# EAGLE board Medium_G2iM+_kit (EAGLE 5.06)
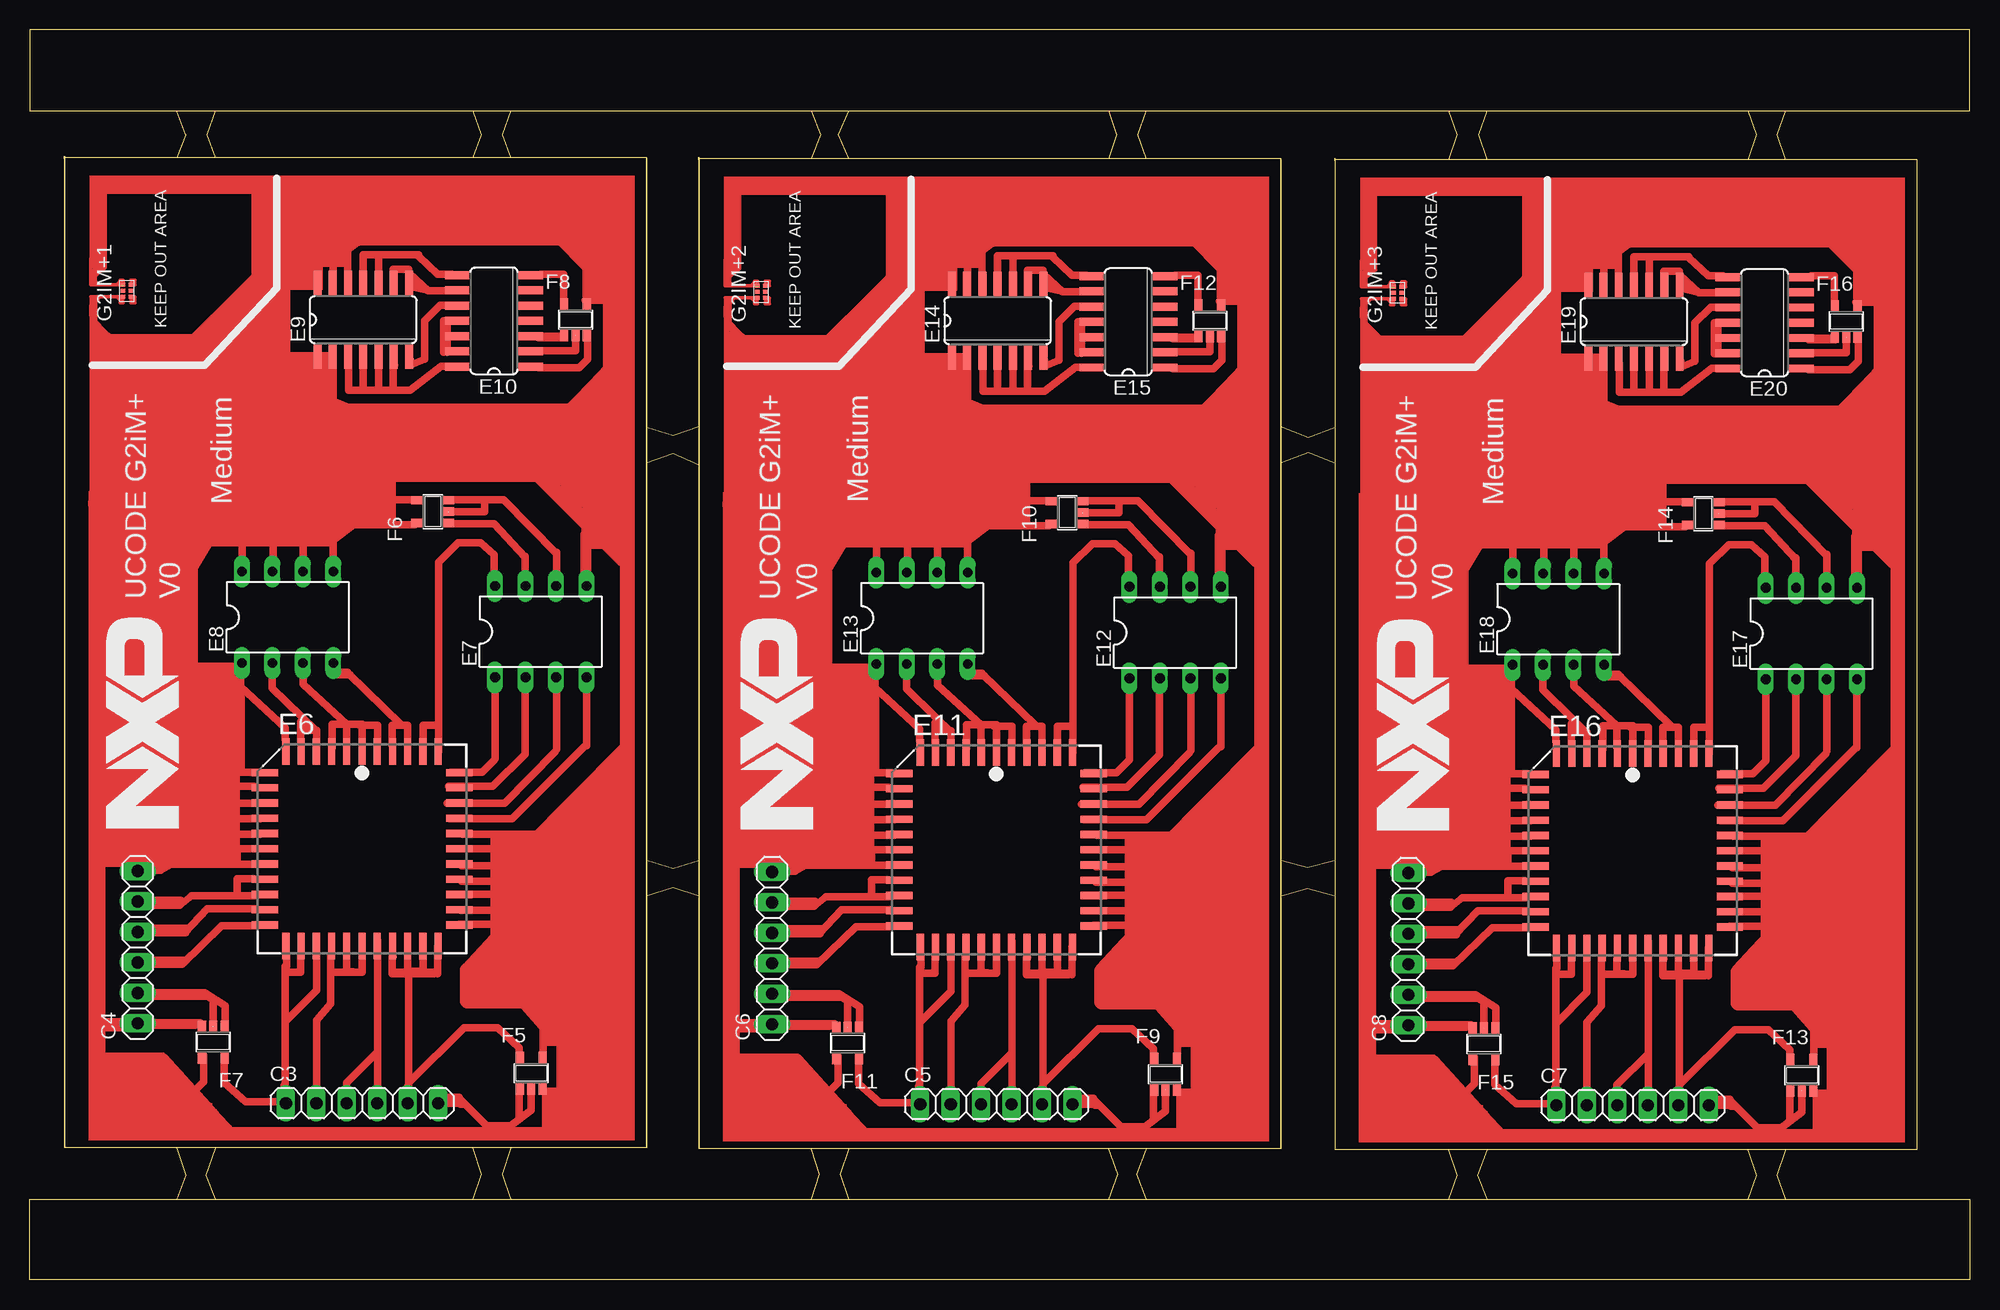
[diagram p0: board, top side]
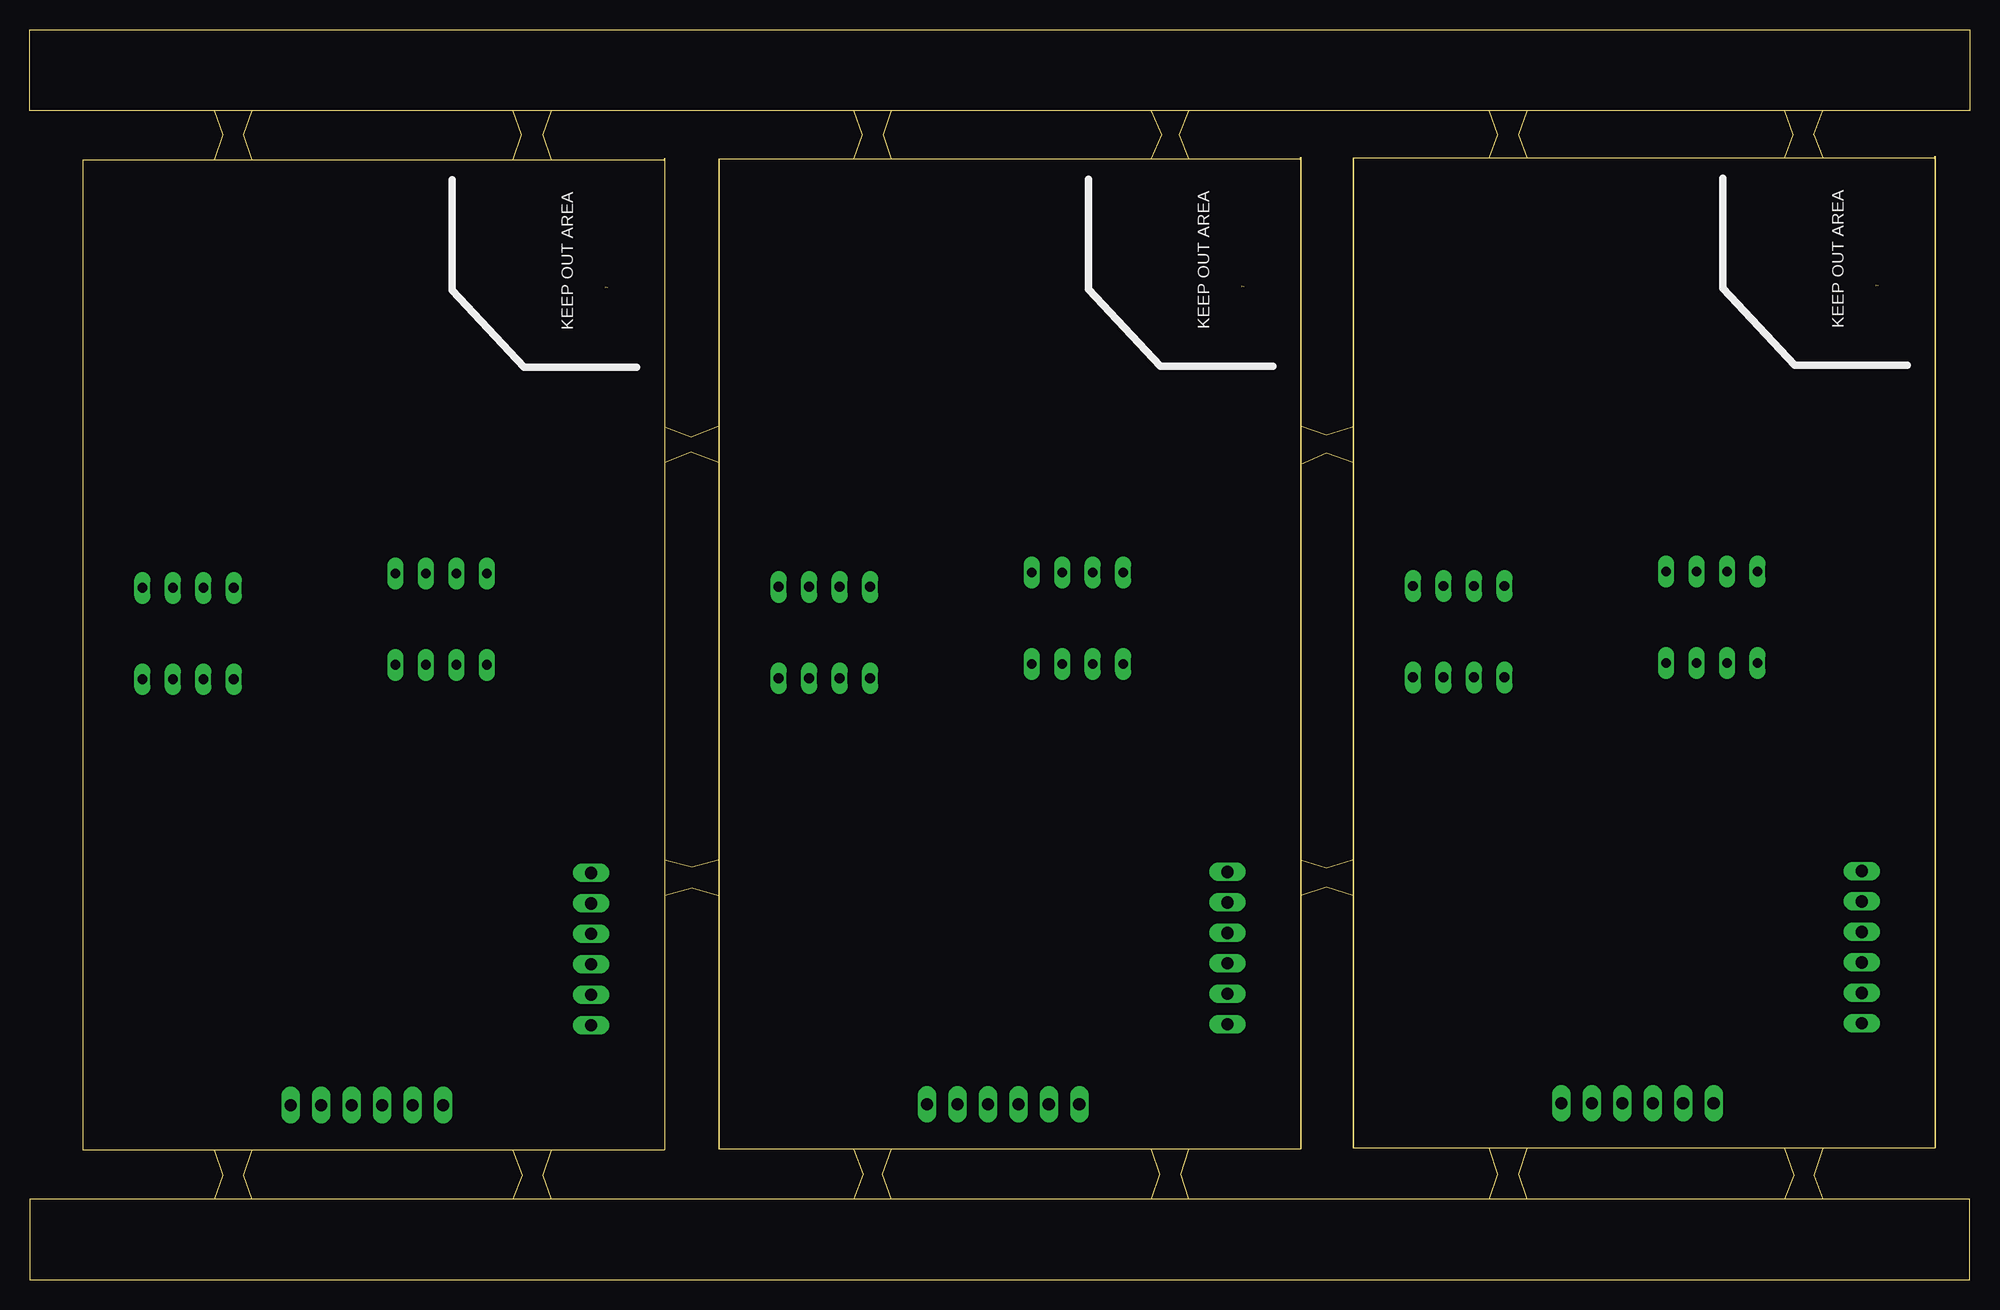
[diagram p1: board, bottom side, seen from below]

Size 161.68 x 104.16 mm. Coordinates in mm from the lower left corner, seen from the top.
Outline: 55.76,71.12 55.76,93.42 104.26,93.42 104.26,10.92 55.76,10.92 55.76,32
Outline: 55.76,71.12 55.76,67.92
Outline: 55.76,67.92 55.76,34.96
Outline: 55.76,34.96 55.76,32
Outline: 108.8,71.04 108.8,93.34 157.3,93.34 157.3,10.84 108.8,10.84 108.8,32
Outline: 108.8,71.04 108.8,68.08
Outline: 108.8,68.08 108.8,34.96
Outline: 108.8,34.96 108.8,32
Outline: 12.24,97.44 0,97.44 0,104.16 161.68,104.16 161.68,97.44 146.32,97.44
Outline: 12.24,97.44 15.44,97.44
Outline: 15.44,97.44 36.88,97.44
Outline: 36.88,97.44 40.08,97.44
Outline: 40.08,97.44 65.12,97.44
Outline: 65.12,97.44 68.24,97.44
Outline: 68.24,97.44 89.92,97.44
Outline: 89.92,97.44 93.04,97.44
Outline: 93.04,97.44 118.24,97.44
Outline: 118.24,97.44 121.44,97.44
Outline: 121.44,97.44 143.2,97.44
Outline: 143.2,97.44 146.32,97.44
Outline: 12.24,6.72 0,6.72 0,0 161.68,0 161.68,6.72 146.32,6.72
Outline: 12.24,6.72 15.44,6.72
Outline: 15.44,6.72 36.88,6.72
Outline: 36.88,6.72 40.08,6.72
Outline: 40.08,6.72 65.12,6.72
Outline: 65.12,6.72 68.24,6.72
Outline: 68.24,6.72 89.92,6.72
Outline: 89.92,6.72 93.04,6.72
Outline: 93.04,6.72 118.24,6.72
Outline: 118.24,6.72 121.44,6.72
Outline: 121.44,6.72 143.2,6.72
Outline: 143.2,6.72 146.32,6.72
Outline: 12.24,93.52 12.96,95.44 12.24,97.44
Outline: 15.44,97.44 14.72,95.44 15.44,93.52
Outline: 40.08,97.44 39.36,95.44 40.08,93.52
Outline: 36.88,97.44 37.6,95.44 36.88,93.52
Outline: 51.44,71.04 53.6,70.4 55.76,71.12
Outline: 104.24,71.12 106.56,70.24 108.8,71.04
Outline: 51.36,68.08 53.6,68.88 55.76,67.92
Outline: 104.24,68.08 106.56,68.96 108.8,68.08
Outline: 51.44,34.96 53.6,34.32 55.76,34.96
Outline: 104.32,34.96 106.48,34.4 108.8,34.96
Outline: 51.36,32 53.6,32.72 55.76,32
Outline: 104.32,32 106.48,32.64 108.8,32
Outline: 12.24,10.96 12.96,8.72 12.24,6.72
Outline: 15.44,10.96 14.64,8.72 15.44,6.72
Outline: 36.88,10.96 37.6,8.8 36.88,6.72
Outline: 40.08,10.96 39.36,8.8 40.08,6.72
Outline: 65.12,97.44 65.92,95.44 65.12,93.44
Outline: 65.12,10.88 65.76,8.8 65.12,6.72
Outline: 68.24,97.44 67.36,95.44 68.24,93.44
Outline: 68.24,10.88 67.52,8.8 68.24,6.72
Outline: 93.04,97.44 92.32,95.44 93.04,93.44
Outline: 89.92,97.44 90.56,95.44 89.92,93.44
Outline: 89.92,10.88 90.64,8.8 89.92,6.72
Outline: 93.04,10.88 92.24,8.8 93.04,6.72
Outline: 118.24,97.44 118.96,95.44 118.24,93.36
Outline: 121.44,97.44 120.72,95.44 121.44,93.36
Outline: 118.24,10.8 118.96,8.72 118.24,6.72
Outline: 121.44,10.8 120.64,8.72 121.44,6.72
Outline: 146.32,97.44 145.6,95.44 146.32,93.36
Outline: 143.2,97.44 143.92,95.44 143.2,93.36
Outline: 143.2,10.8 143.92,8.72 143.2,6.72
Outline: 146.32,10.8 145.6,8.72 146.32,6.72
Outline: 51.38,11 2.88,11 2.88,93.5 51.38,93.5 51.38,11
Outline: 157.28,10.86 108.78,10.86 108.78,93.36 157.28,93.36 157.28,10.86
Outline: 104.24,10.94 55.74,10.94 55.74,93.44 104.24,93.44 104.24,10.94
Outline: 51.36,11.02 2.86,11.02 2.86,93.52 51.36,93.52 51.36,11.02
Outline: 51.38,11.02 2.88,11.02 2.88,93.52 51.38,93.52 51.38,11.02
Outline: 104.26,10.94 55.76,10.94 55.76,93.44 104.26,93.44 104.26,10.94
Outline: 157.3,10.86 108.8,10.86 108.8,93.36 157.3,93.36 157.3,10.86
Copper layers (1*16): Top 0.035mm / dielectric 1.5mm / Bottom 0.035mm
Design rules "default *": minimum track width 10mil, minimum drill 24mil, track to track 0mil, track to pad 0mil, pad to pad 0mil, via to via 8mil, smd to smd 0mil, copper to edge 40mil, drill to drill 8mil, minimum pad ring 10mil, minimum via ring 8mil, stop-mask expansion 0mil, vias tented up to drill 0mil, thermal gap 10mil

## Footprints (pad centres in the part's own frame; a part is rotated, then mirrored left to right if it is on the bottom)
1X06 = drill 1.016 long: 1 -6.35,0; 2 -3.81,0; 3 -1.27,0; 4 1.27,0; 5 3.81,0; 6 6.35,0
PLCC44 = smd 0.6 x 2.2: 1 0,8.1; 2 -1.27,8.1; 3 -2.54,8.1; 4 -3.81,8.1; 5 -5.08,8.1; 6 -6.35,8.1; 18 -6.35,-8.1; 19 -5.08,-8.1; 20 -3.81,-8.1; 21 -2.54,-8.1; 22 -1.27,-8.1; 23 0,-8.1; 24 1.27,-8.1; 25 2.54,-8.1; 26 3.81,-8.1; 27 5.08,-8.1; 28 6.35,-8.1; 40 6.35,8.1; 41 5.08,8.1; 42 3.81,8.1; 43 2.54,8.1; 44 1.27,8.1 | smd 2.2 x 0.6: 7 -8.1,6.35; 8 -8.1,5.08; 9 -8.1,3.81; 10 -8.1,2.54; 11 -8.1,1.27; 12 -8.1,0; 13 -8.1,-1.27; 14 -8.1,-2.54; 15 -8.1,-3.81; 16 -8.1,-5.08; 17 -8.1,-6.35; 29 8.1,-6.35; 30 8.1,-5.08; 31 8.1,-3.81; 32 8.1,-2.54; 33 8.1,-1.27; 34 8.1,0; 35 8.1,1.27; 36 8.1,2.54; 37 8.1,3.81; 38 8.1,5.08; 39 8.1,6.35
DIL08 = drill 0.813 long: 1 -3.81,-3.81; 2 -1.27,-3.81; 3 1.27,-3.81; 4 3.81,-3.81; 5 3.81,3.81; 6 1.27,3.81; 7 -1.27,3.81; 8 -3.81,3.81
SO14 = smd 0.66 x 2.032: 1 -3.81,-3.073; 2 -2.54,-3.073; 3 -1.27,-3.073; 4 0,-3.073; 5 1.27,-3.073; 6 2.54,-3.073; 7 3.81,-3.073; 8 3.81,3.073; 9 2.54,3.073; 10 1.27,3.073; 11 0,3.073; 12 -1.27,3.073; 13 -2.54,3.073; 14 -3.81,3.073
SOT23-5 = smd 0.69 x 0.99: 1 -0.95,-1.29; 2 0,-1.29; 3 0.95,-1.29; 4 0.95,1.3; 5 -0.95,1.3
SOT886 = smd 0.35 x 0.4: 1 0.5,0.338; 2 0,0.338; 3 -0.5,0.338; 4 -0.5,-0.338; 5 0,-0.338; 6 0.5,-0.338

## Placement (x,y rotation side)
C3  [1X06]  27.68,14.72 0 top
C4  [1X06]  8.98,27.72 90 top
C5  [1X06]  80.56,14.64 0 top
C6  [1X06]  61.86,27.64 90 top
C7  [1X06]  133.6,14.56 0 top
C8  [1X06]  114.9,27.56 90 top
E6  [PLCC44]  27.68,35.92 0 top
E7  [DIL08]  42.58,54.02 0 top
E8  [DIL08]  21.48,55.22 0 top
E9  [SO14]  27.78,80.02 0 top
E10  [SO14]  38.68,79.92 90 top
E11  [PLCC44]  80.56,35.84 0 top
E12  [DIL08]  95.46,53.94 0 top
E13  [DIL08]  74.36,55.14 0 top
E14  [SO14]  80.66,79.94 0 top
E15  [SO14]  91.56,79.84 90 top
E16  [PLCC44]  133.6,35.76 0 top
E17  [DIL08]  148.5,53.86 0 top
E18  [DIL08]  127.4,55.06 0 top
E19  [SO14]  133.7,79.86 0 top
E20  [SO14]  144.6,79.76 90 top
E$1  [LOGO]  12.38,37.62 90 top
E$3  [LOGO]  65.26,37.54 90 top
E$4  [LOGO]  118.3,37.46 90 top
F5  [SOT23-5]  41.78,17.22 0 top
F6  [SOT23-5]  33.58,64.02 90 top
F7  [SOT23-5]  15.28,19.82 180 top
F8  [SOT23-5]  45.48,80.02 0 top
F9  [SOT23-5]  94.66,17.14 0 top
F10  [SOT23-5]  86.46,63.94 90 top
F11  [SOT23-5]  68.16,19.74 180 top
F12  [SOT23-5]  98.36,79.94 0 top
F13  [SOT23-5]  147.7,17.06 0 top
F14  [SOT23-5]  139.5,63.86 90 top
F15  [SOT23-5]  121.2,19.66 180 top
F16  [SOT23-5]  151.4,79.86 0 top
G2IM+1  [SOT886]  8.08,82.42 90 top
G2IM+2  [SOT886]  60.96,82.34 90 top
G2IM+3  [SOT886]  114,82.26 90 top

## Library data of the parts
C3-C8 = pinhead
E6 E11 E16 = altera
E7 E8 E12 E13 E17 E18 = ic-package
E9 E10 E14 E15 E19 E20 = 74xx-eu
E$1 E$3 E$4 G2IM+1-G2IM+3 = NXP_1
F5-F16 = 74xx-little-us

## Tracks (layer width: path | path; a pad name or v marks a point on that pad's centre or on a via)
S$16
  Top 0.254: 5.08,66.42 5.08,66.32 | 5.08,66.42 5.08,65.82 5.78,65.52 5.08,66.42
S$17
  Top 0.254: 5.08,65.72 5.38,65.72 5.38,65.32 5.18,65.32 5.18,65.62
S$18
  Top 1.422: 12.28,73.72 12.18,73.72
S$19
  Top 1.422: 8.28,63.82 13.98,70.22
S$33
  Top 1.422: 21.88,83.82 12.18,74.32 16.28,76.92 17.08,74.92
S$36
  Top 1.422: 17.78,79.42 17.88,79.42 17.88,74.12 16.88,74.12 16.88,78.22 16.28,78.22 16.28,74.32 15.18,74.32 15.18,75.42 14.28,75.42 14.28,74.32
S$37
  Top 1.422: 12.88,68.52 12.88,63.92 11.78,63.92 11.78,67.32 11.18,66.62 11.08,63.72 10.28,63.72 10.28,63.52 10.38,63.52 10.38,64.72 9.78,64.72 9.78,63.42
S$38
  Top 1.422: 9.38,64.52 5.58,64.52 5.58,64.92 9.88,64.92 9.88,65.02
S$170
  Top 0.254: 5.08,83.02 5.08,85.12 | 5.78,82.92 5.38,83.32 | 7.18,82.92 7.48,83.22 7.78,83.22 7.78,83.02 7.78,83.32 7.48,83.32
  Top 0.305: 7.18,82.92 6.78,82.92 | 7.18,82.92 7.28,82.92 | 6.78,82.92 5.78,82.92 5.08,82.92 5.08,83.02 5.18,83.02 5.18,83.42 | 7.18,82.92 6.78,82.92 | 7.18,82.92 7.78,82.92 | 7.48,83.22 7.48,83.02
S$171
  Top 0.254: 5.28,66.02 5.08,66.02 | 5.28,66.02 5.18,66.22 | 5.28,66.02 5.58,65.62 5.28,65.92 | 5.28,66.02 5.38,66.02 5.28,65.92 | 5.28,65.92 5.28,66.02 | 5.28,65.92 5.08,66.12
S$172
  Top 0.254: 5.18,68.02 5.78,68.02 5.78,68.22 5.38,68.22 5.38,68.62 5.58,68.62 5.58,68.32
S$173
  Top 1.27: 13.18,71.72 13.78,71.72 13.78,72.12 7.98,66.22
S$174
  Top 0.254: 11.38,69.22 11.38,68.42
S$175
  Top 0.61: 34.88,41.12 38.58,41.12 41.28,43.82 41.28,50.12 41.38,50.12
S$176
  Top 0.61: 46.48,58.42 46.48,63.42 | 46.48,63.42 46.48,63.62 | 46.48,63.42 46.48,68.92
S$177
  Top 0.61: 46.18,62.12 46.18,58.12
S$178
  Top 0.61: 34.78,39.72 39.48,39.72
S$179
  Top 0.61: 39.58,39.72 43.78,44.02
S$180
  Top 0.61: 43.88,49.92 43.88,44.22
S$181
  Top 0.61: 38.78,43.42 38.78,50.12
S$182
  Top 0.61: 38.68,43.32 37.68,42.32 35.08,42.32
S$183
  Top 0.61: 34.98,38.42 40.18,38.42 46.18,44.42
S$184
  Top 0.61: 46.38,49.92 46.38,44.52
S$185
  Top 0.61: 42.78,18.52 42.78,24.62
S$186
  Top 0.61: 42.78,15.72 47.98,15.72 47.98,15.82
S$187
  Top 0.61: 36.08,37.12 48.68,37.12 48.98,37.12 | 49.48,37.12 48.98,37.12 | 48.98,37.12 48.98,35.52
  Top 1.27: 48.68,37.12 48.88,37.12 48.88,42.42 48.18,42.42 48.18,37.02 47.68,37.02 47.68,40.72 46.88,40.72 46.88,37.32 45.98,37.32 45.98,39.52 45.48,39.52 45.48,37.32 44.48,37.32 44.48,38.02
S$188
  Top 0.61: 35.58,35.92 49.18,35.92
S$189
  Top 0.61: 35.78,29.62 43.68,29.62 43.68,29.52
S$190
  Top 0.61: 35.88,30.82 41.68,30.82 44.18,30.82
  Top 1.27: 36.48,25.82 42.78,32.62 42.78,25.32 41.68,25.32 41.68,30.82
S$191
  Top 0.61: 35.68,32.12 43.88,32.12 43.88,31.92
S$192
  Top 0.61: 35.98,33.22 43.48,33.22 43.48,33.12
S$193
  Top 0.61: 35.98,34.52 43.48,34.52 43.48,34.42
S$194
  Top 0.61: 41.78,15.82 41.78,14.12 40.08,12.82
S$195
  Top 0.61: 40.78,15.62 40.78,13.62
S$196
  Top 0.61: 31.48,15.02 31.48,16.12 31.58,16.12 31.58,25.72 | 31.48,27.02 31.48,25.72 31.58,25.72 | 31.58,25.72 32.78,25.72 32.78,27.02
S$197
  Top 0.61: 31.58,16.42 36.18,21.02
S$198
  Top 0.61: 40.78,18.52 40.78,19.22
S$199
  Top 0.61: 40.78,19.32 38.98,21.02 36.18,21.02
S$200
  Top 0.61: 28.88,15.02 28.98,15.02 28.98,28.32
S$201
  Top 0.61: 34.98,65.02 37.88,65.02 | 37.88,65.02 39.48,65.02 43.88,60.52 | 34.88,64.02 37.88,64.02 37.88,65.02
S$202
  Top 0.61: 43.88,60.62 43.88,58.82
S$203
  Top 0.61: 34.88,63.02 38.68,63.02 41.28,60.22
S$204
  Top 0.61: 41.18,60.32 41.28,60.32 41.28,58.52
S$205
  Top 0.61: 26.38,15.02 26.38,16.42 28.98,19.02 28.98,17.72
S$206
  Top 0.61: 26.38,26.92 26.38,25.62 25.08,25.62 25.08,25.72 | 25.08,25.72 25.08,27.12 | 25.08,25.72 25.08,23.02 23.88,21.62
S$207
  Top 0.61: 22.48,25.62 21.38,25.62
S$208
  Top 0.61: 32.28,65.02 29.88,65.02 27.68,66.62
S$209
  Top 0.61: 27.58,66.72 27.58,69.92
S$210
  Top 0.61: 22.58,27.02 22.58,25.62
S$211
  Top 0.61: 30.28,26.92 30.18,26.92 30.18,25.52
S$212
  Top 0.61: 30.18,25.72 30.18,25.62 33.98,25.52 33.98,27.82
S$213
  Top 0.61: 18.98,42.32 17.18,42.32 | 17.18,42.32 16.78,42.32 | 16.78,42.32 15.08,42.32 15.08,42.22 | 18.68,41.12 17.18,41.12 17.18,40.92 | 17.18,40.92 17.18,39.72 18.98,39.72 18.98,39.82 | 17.18,42.32 17.18,40.92 | 16.78,42.32 16.78,39.72 16.38,39.72 | 15.88,39.72 16.38,39.72 | 16.38,39.72 16.38,42.12
S$214
  Top 0.61: 19.18,38.42 15.08,38.42 15.08,38.52
S$215
  Top 0.61: 19.18,37.12 15.38,37.12 15.38,37.22
S$216
  Top 0.61: 18.58,35.92 17.28,35.92 17.28,34.62 | 17.28,34.62 18.78,34.62 | 11.78,34.62 17.28,34.62
S$217
  Top 0.61: 9.98,34.12 10.88,34.12 11.78,34.62
S$218
  Top 0.61: 16.18,18.32 16.18,16.42
S$219
  Top 0.61: 16.18,16.42 17.98,14.82
S$220
  Top 0.61: 21.38,14.82 17.98,14.82
S$221
  Top 0.61: 14.38,18.72 14.48,18.72 14.48,16.52 12.78,14.82 5.98,14.82 5.98,14.92
S$222
  Top 0.61: 17.58,50.72 17.58,48.02 14.28,44.22
S$223
  Top 0.61: 8.18,21.32 6.08,21.32
S$224
  Top 0.61: 15.98,29.52 18.88,29.52
S$225
  Top 0.61: 14.18,21.42 9.78,21.42
S$226
  Top 0.61: 16.28,21.42 16.28,22.82 14.58,23.92 9.88,23.92
S$227
  Top 0.61: 15.28,21.32 15.28,23.12
S$228
  Top 0.61: 18.88,30.92 14.78,30.92 12.88,28.92
S$229
  Top 0.61: 9.78,28.92 12.98,28.92
S$230
  Top 0.61: 10.28,26.32 12.68,26.32 15.98,29.52
S$231
  Top 0.61: 17.28,32.02 13.48,32.02 12.48,31.22 9.88,31.22 9.88,31.32 | 17.28,32.02 18.78,32.02 | 18.68,33.42 17.28,33.42 17.28,32.02
S$232
  Top 0.61: 25.28,59.72 25.28,61.62 26.98,62.92 32.08,62.92 32.08,63.12
S$233
  Top 0.61: 20.28,59.92 20.28,61.42 | 22.78,60.82 22.78,61.42 20.28,61.42 | 22.78,60.82 22.78,60.02 | 20.28,61.42 17.68,61.42 17.68,60.92 | 17.68,60.92 17.68,59.72 | 20.28,61.42 20.28,63.92 | 17.58,62.82 17.68,62.82 17.68,60.92 | 22.78,62.82 22.78,60.82
S$234
  Top 0.61: 38.68,58.82 38.68,60.42 37.58,61.42 35.68,61.42 34.08,59.82
S$235
  Top 0.61: 23.88,44.22 23.88,45.72 22.58,47.02 20.18,49.32
S$236
  Top 0.61: 17.58,49.42 21.28,46.02 21.28,45.02
S$237
  Top 0.61: 20.18,50.82 20.18,49.32
S$238
  Top 0.61: 31.48,25.62 30.28,25.62
S$239
  Top 0.61: 33.78,25.62 31.58,25.62 31.58,25.52 | 31.58,25.52 30.38,25.52 | 31.58,25.52 33.68,25.52
S$240
  Top 0.61: 22.78,50.82 22.78,49.62 26.38,46.32
S$241
  Top 0.61: 28.98,44.82 28.98,46.22 27.48,46.22 27.48,46.32 | 27.68,44.82 27.68,46.32 27.48,46.32 | 27.48,46.32 26.38,46.32 | 26.38,46.32 25.18,46.32 25.18,44.32 | 26.38,44.52 26.38,46.32
S$242
  Top 0.61: 32.78,44.92 32.78,46.22 34.08,46.22 | 34.08,44.92 34.08,46.22 | 34.08,46.22 34.08,59.82 | 34.08,46.22 34.08,44.02
S$243
  Top 0.61: 31.48,44.52 31.48,46.22 30.18,46.22 30.18,44.52
S$244
  Top 0.61: 30.88,46.32 26.58,50.52
S$245
  Top 1.27: 41.58,36.02 49.68,44.22
S$246
  Top 1.27: 38.68,23.22 36.48,23.22 36.48,25.82 38.58,25.82 38.58,25.62 38.28,25.62 38.28,23.82 37.58,23.82 37.58,24.82
S$247
  Top 1.27: 13.28,59.42 13.08,59.92 11.78,56.72 18.08,67.22
S$248
  Top 1.27: 49.48,60.02 39.78,69.72 39.78,69.62 39.98,69.62
S$249
  Top 1.27: 45.38,69.52 45.78,69.52 45.78,65.02 44.98,65.02 44.98,66.12 44.88,66.12 44.88,68.82 42.68,68.82 42.68,68.42 44.08,68.42 44.08,67.42 44.18,67.42 44.18,66.82 43.48,66.82 43.48,67.52
S$250
  Top 1.27: 42.58,69.52 42.48,69.52 42.48,67.42 42.18,67.42 42.18,68.92
S$251
  Top 1.27: 15.88,62.92 15.68,62.92
S$252
  Top 1.27: 40.38,26.72 37.78,26.72 37.78,26.52
S$253
  Top 1.27: 14.58,14.02 9.78,14.02 9.78,14.12 14.98,13.92 10.98,18.32
S$254
  Top 1.27: 11.88,15.72 12.88,15.72 12.88,14.12
S$255
  Top 0.61: 10.18,62.52 14.28,62.52 14.28,61.82
S$256
  Top 0.61: 26.68,50.42 25.18,50.42
S$257
  Top 0.61: 25.18,50.62 26.48,50.62
S$258
  Top 0.61: 23.88,45.82 22.58,45.82 | 22.58,45.82 22.58,44.82 | 22.58,45.82 22.58,46.52 22.88,46.52 22.88,46.22
S$259
  Top 0.61: 12.58,31.62 9.98,31.62
S$260
  Top 0.61: 13.08,29.32 9.78,29.32
S$261
  Top 0.61: 9.98,26.62 12.88,26.62
S$262
  Top 0.61: 9.78,23.62 14.98,23.62 14.98,23.52
S$263
  Top 0.61: 9.78,21.22 13.78,21.22
S$264
  Top 0.61: 6.08,21.02 8.18,21.02 8.18,21.52 6.38,21.52
S$265
  Top 0.61: 20.98,15.12 21.18,15.12 21.18,16.22
S$266
  Top 0.61: 22.58,61.82 18.08,61.82
S$267
  Top 0.61: 22.48,62.32 17.98,62.32
S$268
  Top 0.61: 17.98,62.42 14.38,62.42 14.38,62.32
S$269
  Top 0.61: 22.68,62.42 25.98,62.42 25.98,62.32
S$270
  Top 1.016: 40.68,23.62 43.68,20.22 45.98,19.72
S$271
  Top 1.016: 46.88,22.42 42.48,22.42 42.48,22.52
S$272
  Top 1.016: 20.18,85.02 20.18,87.02 21.48,87.02 18.88,83.52 12.08,76.72 12.08,77.82 18.88,77.82
S$273
  Top 1.016: 19.48,84.12 19.58,84.12 19.58,82.62 20.28,82.62 20.28,84.22
S$274
  Top 0.61: 25.28,84.02 25.28,84.72 26.48,84.72 26.48,83.82
S$275
  Top 0.61: 35.18,83.82 33.98,83.82 32.38,85.32
S$276
  Top 0.61: 32.38,85.42 27.78,85.42 27.78,83.82
S$277
  Top 0.61: 29.08,85.32 29.08,83.32
S$278
  Top 0.61: 35.28,82.42 33.38,82.42 | 33.38,82.42 33.18,82.42 31.58,83.92 31.58,82.82 33.38,82.42
S$279
  Top 0.61: 31.98,83.32 32.08,83.32 32.08,82.92
S$280
  Top 0.61: 31.58,84.02 31.58,84.22 30.28,84.22 30.28,83.92
S$281
  Top 0.61: 44.58,81.62 44.48,81.62 44.48,83.82 42.58,83.82 42.58,83.72
S$282
  Top 0.61: 46.28,81.62 47.88,81.62
S$283
  Top 0.61: 44.58,78.52 42.38,78.52 42.38,78.62 44.28,78.62
S$284
  Top 0.61: 42.38,77.42 45.48,77.42 45.48,78.82
S$285
  Top 0.61: 42.38,76.02 45.78,76.02 46.48,76.72 46.48,78.62
S$286
  Top 0.61: 35.18,81.22 34.18,81.22 32.88,79.92 32.88,76.92
S$287
  Top 0.61: 32.88,76.72 31.68,76.22 31.68,76.72
S$288
  Top 0.61: 34.78,79.92 34.78,77.32
S$289
  Top 0.61: 34.48,79.92 34.48,77.32
S$290
  Top 0.61: 34.98,76.12 34.28,76.12 31.68,74.12 30.28,74.12 | 30.28,74.12 26.58,74.12 26.58,76.52 | 30.38,76.22 30.28,76.22 30.28,74.12
S$291
  Top 0.61: 27.78,76.32 27.78,74.42
S$292
  Top 0.61: 29.08,76.22 29.08,74.22
S$293
  Top 1.016: 44.48,71.92 46.98,74.52 48.98,76.62
S$294
  Top 1.016: 47.68,72.42 47.68,74.32 47.18,74.32 47.18,72.42 46.58,72.42 46.58,73.02
S$295
  Top 1.016: 48.28,78.22 48.28,82.62 42.38,88.62
S$296
  Top 1.016: 45.88,86.72 45.88,85.62
S$297
  Top 1.016: 25.78,85.52 25.68,85.52 27.18,86.62 29.18,87.02
S$298
  Top 1.016: 23.98,74.52 24.08,74.52 24.08,71.42 22.88,71.42 22.88,74.02 29.28,71.42
S$299
  Top 0.61: 23.78,14.92 23.88,14.92 23.88,21.52
S$300
  Top 0.61: 27.68,25.62 27.68,27.22 | 27.68,25.62 26.38,25.72 | 26.48,25.62 27.68,25.62
S$301
  Top 0.61: 21.38,27.02 21.38,26.12 21.28,26.12 21.28,14.82
S$302
  Top 0.61: 23.88,25.32 23.88,26.92 | 23.88,25.32 23.88,24.82 | 23.88,24.22 23.88,25.32
S$303
  Top 0.61: 23.88,24.12 21.28,21.52 21.28,24.12
S$304
  Top 0.61: 39.98,12.82 38.08,12.82 35.78,15.12
S$305
  Top 0.61: 35.78,15.22 33.98,15.22 33.98,14.72 35.58,14.72 35.58,14.82 35.88,14.82 35.88,14.62 36.08,14.62
S$306
  Top 0.254: 5.28,79.92 5.28,78.92 6.08,78.92 6.08,79.02 5.98,79.02 5.98,79.22 5.48,79.22 5.48,79.72 5.68,79.72 5.68,79.42 5.78,79.42 5.78,79.02 5.48,79.02
S$307
  Top 0.61: 20.78,86.62 20.98,86.62 20.98,83.42 18.68,83.42 18.68,80.92 18.28,80.92 18.28,82.02 17.98,82.02 17.98,80.82 17.58,80.82 17.58,81.32 17.28,81.32 17.28,79.92 16.88,79.92 16.88,80.72 16.48,80.72 16.48,78.92 16.18,78.92 | 15.28,78.92 16.18,78.92 | 16.18,78.92 16.18,79.72 15.68,79.72 15.68,79.22
S$308
  Top 0.254: 5.18,83.22 5.18,83.42 6.28,84.32
  Top 0.305: 5.18,83.42 5.18,83.02
S$309
  Top 0.254: 5.28,84.22 5.28,84.02 | 5.28,83.52 5.28,84.02 | 5.28,84.02 5.58,84.02 | 5.58,84.02 5.88,84.02 5.88,84.12 5.48,83.92 5.48,83.82 5.58,84.02 | 5.58,84.02 5.58,83.92
S$310
  Top 0.254: 5.38,84.42 5.48,84.42 5.48,84.12 5.98,84.12 5.98,84.22 6.08,84.22 6.08,84.32 5.58,84.32 5.58,84.22
S$311
  Top 0.254: 6.28,78.72 6.28,79.02
S$312
  Top 0.254: 15.28,79.42 15.38,79.42 15.38,79.02
S$313
  Top 0.254: 16.18,80.22 16.18,79.92
S$314
  Top 0.254: 5.48,81.92 6.78,81.92 | 5.08,81.92 5.08,78.32 | 6.58,78.82 5.18,80.22 5.08,80.32 5.08,81.22
  Top 0.305: 7.08,81.92 7.28,81.92 | 5.48,81.92 7.08,81.92 | 5.48,81.92 5.08,81.92 5.18,81.92 5.18,81.52 | 5.18,80.22 5.18,81.52 | 7.08,81.92 7.48,81.92 7.78,81.92 | 5.18,81.52 5.48,81.92
S$315
  Top 0.305: 5.58,82.92 5.18,83.12
S$316
  Top 0.406: 16.98,12.32 14.78,14.72
S$317
  Top 0.406: 5.38,81.72 5.38,81.52 | 5.38,81.52 5.38,79.82 | 5.38,81.52 5.68,81.82
S$318
  Top 0.254: 8.38,82.92 8.78,82.92 8.78,83.32 8.38,83.32 8.38,83.02 8.68,83.02 8.68,83.12 8.58,83.12
  Top 0.305: 8.38,82.92 8.58,82.92
S$319
  Top 0.254: 7.48,81.62 7.18,81.92
S$320
  Top 0.305: 8.38,81.82 8.58,81.82
S$321
  Top 0.254: 7.48,81.82 7.48,81.42 7.78,81.42 7.78,81.82 7.68,81.82 7.68,81.52
S$322
  Top 0.254: 8.38,81.92 8.38,81.42 8.78,81.42 8.78,81.92 8.48,81.92 8.48,81.52 8.68,81.52 8.68,81.72
S$323
  Top 0.254: 57.96,66.34 57.96,66.24 | 57.96,66.34 57.96,65.74 58.66,65.44 57.96,66.34
S$324
  Top 0.254: 57.96,65.64 58.26,65.64 58.26,65.24 58.06,65.24 58.06,65.54
S$325
  Top 1.422: 65.16,73.64 65.06,73.64
S$326
  Top 1.422: 61.16,63.74 66.86,70.14
S$327
  Top 1.422: 74.76,83.74 65.06,74.24 69.16,76.84 69.96,74.84
S$328
  Top 1.422: 70.66,79.34 70.76,79.34 70.76,74.04 69.76,74.04 69.76,78.14 69.16,78.14 69.16,74.24 68.06,74.24 68.06,75.34 67.16,75.34 67.16,74.24
S$329
  Top 1.422: 65.76,68.44 65.76,63.84 64.66,63.84 64.66,67.24 64.06,66.54 63.96,63.64 63.16,63.64 63.16,63.44 63.26,63.44 63.26,64.64 62.66,64.64 62.66,63.34
S$330
  Top 1.422: 62.26,64.44 58.46,64.44 58.46,64.84 62.76,64.84 62.76,64.94
S$331
  Top 0.254: 57.96,82.94 57.96,85.04 | 58.66,82.84 58.26,83.24 | 60.06,82.84 60.36,83.14 60.66,83.14 60.66,82.94 60.66,83.24 60.36,83.24
  Top 0.305: 60.06,82.84 59.66,82.84 | 60.06,82.84 60.16,82.84 | 59.66,82.84 58.66,82.84 57.96,82.84 57.96,82.94 58.06,82.94 58.06,83.34 | 60.06,82.84 59.66,82.84 | 60.06,82.84 60.66,82.84 | 60.36,83.14 60.36,82.94
S$332
  Top 0.254: 58.16,65.94 57.96,65.94 | 58.16,65.94 58.06,66.14 | 58.16,65.94 58.46,65.54 58.16,65.84 | 58.16,65.94 58.26,65.94 58.16,65.84 | 58.16,65.84 58.16,65.94 | 58.16,65.84 57.96,66.04
S$333
  Top 0.254: 58.06,67.94 58.66,67.94 58.66,68.14 58.26,68.14 58.26,68.54 58.46,68.54 58.46,68.24
S$334
  Top 1.27: 66.06,71.64 66.66,71.64 66.66,72.04 60.86,66.14
S$335
  Top 0.254: 64.26,69.14 64.26,68.34
S$336
  Top 0.61: 87.76,41.04 91.46,41.04 94.16,43.74 94.16,50.04 94.26,50.04
S$337
  Top 0.61: 99.36,58.34 99.36,63.34 | 99.36,63.34 99.36,63.54 | 99.36,63.34 99.36,68.84
S$338
  Top 0.61: 99.06,62.04 99.06,58.04
S$339
  Top 0.61: 87.66,39.64 92.36,39.64
S$340
  Top 0.61: 92.46,39.64 96.66,43.94
S$341
  Top 0.61: 96.76,49.84 96.76,44.14
S$342
  Top 0.61: 91.66,43.34 91.66,50.04
S$343
  Top 0.61: 91.56,43.24 90.56,42.24 87.96,42.24
S$344
  Top 0.61: 87.86,38.34 93.06,38.34 99.06,44.34
S$345
  Top 0.61: 99.26,49.84 99.26,44.44
S$346
  Top 0.61: 95.66,18.44 95.66,24.54
S$347
  Top 0.61: 95.66,15.64 100.86,15.64 100.86,15.74
S$348
  Top 0.61: 88.96,37.04 101.56,37.04 101.86,37.04 | 102.36,37.04 101.86,37.04 | 101.86,37.04 101.86,35.44
  Top 1.27: 101.56,37.04 101.76,37.04 101.76,42.34 101.06,42.34 101.06,36.94 100.56,36.94 100.56,40.64 99.76,40.64 99.76,37.24 98.86,37.24 98.86,39.44 98.36,39.44 98.36,37.24 97.36,37.24 97.36,37.94
S$349
  Top 0.61: 88.46,35.84 102.06,35.84
S$350
  Top 0.61: 88.66,29.54 96.56,29.54 96.56,29.44
S$351
  Top 0.61: 88.76,30.74 94.56,30.74 97.06,30.74
  Top 1.27: 89.36,25.74 95.66,32.54 95.66,25.24 94.56,25.24 94.56,30.74
S$352
  Top 0.61: 88.56,32.04 96.76,32.04 96.76,31.84
S$353
  Top 0.61: 88.86,33.14 96.36,33.14 96.36,33.04
S$354
  Top 0.61: 88.86,34.44 96.36,34.44 96.36,34.34
S$355
  Top 0.61: 94.66,15.74 94.66,14.04 92.96,12.74
S$356
  Top 0.61: 93.66,15.54 93.66,13.54
S$357
  Top 0.61: 84.36,14.94 84.36,16.04 84.46,16.04 84.46,25.64 | 84.36,26.94 84.36,25.64 84.46,25.64 | 84.46,25.64 85.66,25.64 85.66,26.94
S$358
  Top 0.61: 84.46,16.34 89.06,20.94
S$359
  Top 0.61: 93.66,18.44 93.66,19.14
S$360
  Top 0.61: 93.66,19.24 91.86,20.94 89.06,20.94
S$361
  Top 0.61: 81.76,14.94 81.86,14.94 81.86,28.24
S$362
  Top 0.61: 87.86,64.94 90.76,64.94 | 90.76,64.94 92.36,64.94 96.76,60.44 | 87.76,63.94 90.76,63.94 90.76,64.94
S$363
  Top 0.61: 96.76,60.54 96.76,58.74
S$364
  Top 0.61: 87.76,62.94 91.56,62.94 94.16,60.14
S$365
  Top 0.61: 94.06,60.24 94.16,60.24 94.16,58.44
S$366
  Top 0.61: 79.26,14.94 79.26,16.34 81.86,18.94 81.86,17.64
S$367
  Top 0.61: 79.26,26.84 79.26,25.54 77.96,25.54 77.96,25.64 | 77.96,25.64 77.96,27.04 | 77.96,25.64 77.96,22.94 76.76,21.54
S$368
  Top 0.61: 75.36,25.54 74.26,25.54
S$369
  Top 0.61: 85.16,64.94 82.76,64.94 80.56,66.54
S$370
  Top 0.61: 80.46,66.64 80.46,69.84
S$371
  Top 0.61: 75.46,26.94 75.46,25.54
S$372
  Top 0.61: 83.16,26.84 83.06,26.84 83.06,25.44
S$373
  Top 0.61: 83.06,25.64 83.06,25.54 86.86,25.44 86.86,27.74
S$374
  Top 0.61: 71.86,42.24 70.06,42.24 | 70.06,42.24 69.66,42.24 | 69.66,42.24 67.96,42.24 67.96,42.14 | 71.56,41.04 70.06,41.04 70.06,40.84 | 70.06,40.84 70.06,39.64 71.86,39.64 71.86,39.74 | 70.06,42.24 70.06,40.84 | 69.66,42.24 69.66,39.64 69.26,39.64 | 68.76,39.64 69.26,39.64 | 69.26,39.64 69.26,42.04
S$375
  Top 0.61: 72.06,38.34 67.96,38.34 67.96,38.44
S$376
  Top 0.61: 72.06,37.04 68.26,37.04 68.26,37.14
S$377
  Top 0.61: 71.46,35.84 70.16,35.84 70.16,34.54 | 70.16,34.54 71.66,34.54 | 64.66,34.54 70.16,34.54
S$378
  Top 0.61: 62.86,34.04 63.76,34.04 64.66,34.54
S$379
  Top 0.61: 69.06,18.24 69.06,16.34
S$380
  Top 0.61: 69.06,16.34 70.86,14.74
S$381
  Top 0.61: 74.26,14.74 70.86,14.74
S$382
  Top 0.61: 67.26,18.64 67.36,18.64 67.36,16.44 65.66,14.74 58.86,14.74 58.86,14.84
S$383
  Top 0.61: 70.46,50.64 70.46,47.94 67.16,44.14
S$384
  Top 0.61: 61.06,21.24 58.96,21.24
S$385
  Top 0.61: 68.86,29.44 71.76,29.44
S$386
  Top 0.61: 67.06,21.34 62.66,21.34
S$387
  Top 0.61: 69.16,21.34 69.16,22.74 67.46,23.84 62.76,23.84
S$388
  Top 0.61: 68.16,21.24 68.16,23.04
S$389
  Top 0.61: 71.76,30.84 67.66,30.84 65.76,28.84
S$390
  Top 0.61: 62.66,28.84 65.86,28.84
S$391
  Top 0.61: 63.16,26.24 65.56,26.24 68.86,29.44
S$392
  Top 0.61: 70.16,31.94 66.36,31.94 65.36,31.14 62.76,31.14 62.76,31.24 | 70.16,31.94 71.66,31.94 | 71.56,33.34 70.16,33.34 70.16,31.94
S$393
  Top 0.61: 78.16,59.64 78.16,61.54 79.86,62.84 84.96,62.84 84.96,63.04
S$394
  Top 0.61: 73.16,59.84 73.16,61.34 | 75.66,60.74 75.66,61.34 73.16,61.34 | 75.66,60.74 75.66,59.94 | 73.16,61.34 70.56,61.34 70.56,60.84 | 70.56,60.84 70.56,59.64 | 73.16,61.34 73.16,63.84 | 70.46,62.74 70.56,62.74 70.56,60.84 | 75.66,62.74 75.66,60.74
S$395
  Top 0.61: 91.56,58.74 91.56,60.34 90.46,61.34 88.56,61.34 86.96,59.74
S$396
  Top 0.61: 76.76,44.14 76.76,45.64 75.46,46.94 73.06,49.24
S$397
  Top 0.61: 70.46,49.34 74.16,45.94 74.16,44.94
S$398
  Top 0.61: 73.06,50.74 73.06,49.24
S$399
  Top 0.61: 84.36,25.54 83.16,25.54
S$400
  Top 0.61: 86.66,25.54 84.46,25.54 84.46,25.44 | 84.46,25.44 83.26,25.44 | 84.46,25.44 86.56,25.44
S$401
  Top 0.61: 75.66,50.74 75.66,49.54 79.26,46.24
S$402
  Top 0.61: 81.86,44.74 81.86,46.14 80.36,46.14 80.36,46.24 | 80.56,44.74 80.56,46.24 80.36,46.24 | 80.36,46.24 79.26,46.24 | 79.26,46.24 78.06,46.24 78.06,44.24 | 79.26,44.44 79.26,46.24
S$403
  Top 0.61: 85.66,44.84 85.66,46.14 86.96,46.14 | 86.96,44.84 86.96,46.14 | 86.96,46.14 86.96,59.74 | 86.96,46.14 86.96,43.94
S$404
  Top 0.61: 84.36,44.44 84.36,46.14 83.06,46.14 83.06,44.44
S$405
  Top 0.61: 83.76,46.24 79.46,50.44
S$406
  Top 1.27: 94.46,35.94 102.56,44.14
S$407
  Top 1.27: 91.56,23.14 89.36,23.14 89.36,25.74 91.46,25.74 91.46,25.54 91.16,25.54 91.16,23.74 90.46,23.74 90.46,24.74
S$408
  Top 1.27: 66.16,59.34 65.96,59.84 64.66,56.64 70.96,67.14
S$409
  Top 1.27: 102.36,59.94 92.66,69.64 92.66,69.54 92.86,69.54
S$410
  Top 1.27: 98.26,69.44 98.66,69.44 98.66,64.94 97.86,64.94 97.86,66.04 97.76,66.04 97.76,68.74 95.56,68.74 95.56,68.34 96.96,68.34 96.96,67.34 97.06,67.34 97.06,66.74 96.36,66.74 96.36,67.44
S$411
  Top 1.27: 95.46,69.44 95.36,69.44 95.36,67.34 95.06,67.34 95.06,68.84
S$412
  Top 1.27: 68.76,62.84 68.56,62.84
S$413
  Top 1.27: 93.26,26.64 90.66,26.64 90.66,26.44
S$414
  Top 1.27: 67.46,13.94 62.66,13.94 62.66,14.04 67.86,13.84 63.86,18.24
S$415
  Top 1.27: 64.76,15.64 65.76,15.64 65.76,14.04
S$416
  Top 0.61: 63.06,62.44 67.16,62.44 67.16,61.74
S$417
  Top 0.61: 79.56,50.34 78.06,50.34
S$418
  Top 0.61: 78.06,50.54 79.36,50.54
S$419
  Top 0.61: 76.76,45.74 75.46,45.74 | 75.46,45.74 75.46,44.74 | 75.46,45.74 75.46,46.44 75.76,46.44 75.76,46.14
S$420
  Top 0.61: 65.46,31.54 62.86,31.54
S$421
  Top 0.61: 65.96,29.24 62.66,29.24
S$422
  Top 0.61: 62.86,26.54 65.76,26.54
S$423
  Top 0.61: 62.66,23.54 67.86,23.54 67.86,23.44
S$424
  Top 0.61: 62.66,21.14 66.66,21.14
S$425
  Top 0.61: 58.96,20.94 61.06,20.94 61.06,21.44 59.26,21.44
S$426
  Top 0.61: 73.86,15.04 74.06,15.04 74.06,16.14
S$427
  Top 0.61: 75.46,61.74 70.96,61.74
S$428
  Top 0.61: 75.36,62.24 70.86,62.24
S$429
  Top 0.61: 70.86,62.34 67.26,62.34 67.26,62.24
S$430
  Top 0.61: 75.56,62.34 78.86,62.34 78.86,62.24
S$431
  Top 1.016: 93.56,23.54 96.56,20.14 98.86,19.64
S$432
  Top 1.016: 99.76,22.34 95.36,22.34 95.36,22.44
S$433
  Top 1.016: 73.06,84.94 73.06,86.94 74.36,86.94 71.76,83.44 64.96,76.64 64.96,77.74 71.76,77.74
S$434
  Top 1.016: 72.36,84.04 72.46,84.04 72.46,82.54 73.16,82.54 73.16,84.14
S$435
  Top 0.61: 78.16,83.94 78.16,84.64 79.36,84.64 79.36,83.74
S$436
  Top 0.61: 88.06,83.74 86.86,83.74 85.26,85.24
S$437
  Top 0.61: 85.26,85.34 80.66,85.34 80.66,83.74
S$438
  Top 0.61: 81.96,85.24 81.96,83.24
S$439
  Top 0.61: 88.16,82.34 86.26,82.34 | 86.26,82.34 86.06,82.34 84.46,83.84 84.46,82.74 86.26,82.34
S$440
  Top 0.61: 84.86,83.24 84.96,83.24 84.96,82.84
S$441
  Top 0.61: 84.46,83.94 84.46,84.14 83.16,84.14 83.16,83.84
S$442
  Top 0.61: 97.46,81.54 97.36,81.54 97.36,83.74 95.46,83.74 95.46,83.64
S$443
  Top 0.61: 99.16,81.54 100.76,81.54
S$444
  Top 0.61: 97.46,78.44 95.26,78.44 95.26,78.54 97.16,78.54
S$445
  Top 0.61: 95.26,77.34 98.36,77.34 98.36,78.74
S$446
  Top 0.61: 95.26,75.94 98.66,75.94 99.36,76.64 99.36,78.54
S$447
  Top 0.61: 88.06,81.14 87.06,81.14 85.76,79.84 85.76,76.84
S$448
  Top 0.61: 85.76,76.64 84.56,76.14 84.56,76.64
S$449
  Top 0.61: 87.66,79.84 87.66,77.24
S$450
  Top 0.61: 87.36,79.84 87.36,77.24
S$451
  Top 0.61: 87.86,76.04 87.16,76.04 84.56,74.04 83.16,74.04 | 83.16,74.04 79.46,74.04 79.46,76.44 | 83.26,76.14 83.16,76.14 83.16,74.04
S$452
  Top 0.61: 80.66,76.24 80.66,74.34
S$453
  Top 0.61: 81.96,76.14 81.96,74.14
S$454
  Top 1.016: 97.36,71.84 99.86,74.44 101.86,76.54
S$455
  Top 1.016: 100.56,72.34 100.56,74.24 100.06,74.24 100.06,72.34 99.46,72.34 99.46,72.94
S$456
  Top 1.016: 101.16,78.14 101.16,82.54 95.26,88.54
S$457
  Top 1.016: 98.76,86.64 98.76,85.54
S$458
  Top 1.016: 78.66,85.44 78.56,85.44 80.06,86.54 82.06,86.94
S$459
  Top 1.016: 76.86,74.44 76.96,74.44 76.96,71.34 75.76,71.34 75.76,73.94 82.16,71.34
S$460
  Top 0.61: 76.66,14.84 76.76,14.84 76.76,21.44
S$461
  Top 0.61: 80.56,25.54 80.56,27.14 | 80.56,25.54 79.26,25.64 | 79.36,25.54 80.56,25.54
S$462
  Top 0.61: 74.26,26.94 74.26,26.04 74.16,26.04 74.16,14.74
S$463
  Top 0.61: 76.76,25.24 76.76,26.84 | 76.76,25.24 76.76,24.74 | 76.76,24.14 76.76,25.24
S$464
  Top 0.61: 76.76,24.04 74.16,21.44 74.16,24.04
S$465
  Top 0.61: 92.86,12.74 90.96,12.74 88.66,15.04
S$466
  Top 0.61: 88.66,15.14 86.86,15.14 86.86,14.64 88.46,14.64 88.46,14.74 88.76,14.74 88.76,14.54 88.96,14.54
S$467
  Top 0.254: 58.16,79.84 58.16,78.84 58.96,78.84 58.96,78.94 58.86,78.94 58.86,79.14 58.36,79.14 58.36,79.64 58.56,79.64 58.56,79.34 58.66,79.34 58.66,78.94 58.36,78.94
S$468
  Top 0.61: 73.66,86.54 73.86,86.54 73.86,83.34 71.56,83.34 71.56,80.84 71.16,80.84 71.16,81.94 70.86,81.94 70.86,80.74 70.46,80.74 70.46,81.24 70.16,81.24 70.16,79.84 69.76,79.84 69.76,80.64 69.36,80.64 69.36,78.84 69.06,78.84 | 68.16,78.84 69.06,78.84 | 69.06,78.84 69.06,79.64 68.56,79.64 68.56,79.14
S$469
  Top 0.254: 58.06,83.14 58.06,83.34 59.16,84.24
  Top 0.305: 58.06,83.34 58.06,82.94
S$470
  Top 0.254: 58.16,84.14 58.16,83.94 | 58.16,83.44 58.16,83.94 | 58.16,83.94 58.46,83.94 | 58.46,83.94 58.76,83.94 58.76,84.04 58.36,83.84 58.36,83.74 58.46,83.94 | 58.46,83.94 58.46,83.84
S$471
  Top 0.254: 58.26,84.34 58.36,84.34 58.36,84.04 58.86,84.04 58.86,84.14 58.96,84.14 58.96,84.24 58.46,84.24 58.46,84.14
S$472
  Top 0.254: 59.16,78.64 59.16,78.94
S$473
  Top 0.254: 68.16,79.34 68.26,79.34 68.26,78.94
S$474
  Top 0.254: 69.06,80.14 69.06,79.84
S$475
  Top 0.254: 58.36,81.84 59.66,81.84 | 57.96,81.84 57.96,78.24 | 59.46,78.74 58.06,80.14 57.96,80.24 57.96,81.14
  Top 0.305: 59.96,81.84 60.16,81.84 | 58.36,81.84 59.96,81.84 | 58.36,81.84 57.96,81.84 58.06,81.84 58.06,81.44 | 58.06,80.14 58.06,81.44 | 59.96,81.84 60.36,81.84 60.66,81.84 | 58.06,81.44 58.36,81.84
S$476
  Top 0.305: 58.46,82.84 58.06,83.04
S$477
  Top 0.406: 69.86,12.24 67.66,14.64
S$478
  Top 0.406: 58.26,81.64 58.26,81.44 | 58.26,81.44 58.26,79.74 | 58.26,81.44 58.56,81.74
S$479
  Top 0.254: 61.26,82.84 61.66,82.84 61.66,83.24 61.26,83.24 61.26,82.94 61.56,82.94 61.56,83.04 61.46,83.04
  Top 0.305: 61.26,82.84 61.46,82.84
S$480
  Top 0.254: 60.36,81.54 60.06,81.84
S$481
  Top 0.305: 61.26,81.74 61.46,81.74
S$482
  Top 0.254: 60.36,81.74 60.36,81.34 60.66,81.34 60.66,81.74 60.56,81.74 60.56,81.44
S$483
  Top 0.254: 61.26,81.84 61.26,81.34 61.66,81.34 61.66,81.84 61.36,81.84 61.36,81.44 61.56,81.44 61.56,81.64
S$484
  Top 0.254: 111,66.26 111,66.16 | 111,66.26 111,65.66 111.7,65.36 111,66.26
S$485
  Top 0.254: 111,65.56 111.3,65.56 111.3,65.16 111.1,65.16 111.1,65.46
S$486
  Top 1.422: 118.2,73.56 118.1,73.56
S$487
  Top 1.422: 114.2,63.66 119.9,70.06
S$488
  Top 1.422: 127.8,83.66 118.1,74.16 122.2,76.76 123,74.76
S$489
  Top 1.422: 123.7,79.26 123.8,79.26 123.8,73.96 122.8,73.96 122.8,78.06 122.2,78.06 122.2,74.16 121.1,74.16 121.1,75.26 120.2,75.26 120.2,74.16
S$490
  Top 1.422: 118.8,68.36 118.8,63.76 117.7,63.76 117.7,67.16 117.1,66.46 117,63.56 116.2,63.56 116.2,63.36 116.3,63.36 116.3,64.56 115.7,64.56 115.7,63.26
S$491
  Top 1.422: 115.3,64.36 111.5,64.36 111.5,64.76 115.8,64.76 115.8,64.86
S$492
  Top 0.254: 111,82.86 111,84.96 | 111.7,82.76 111.3,83.16 | 113.1,82.76 113.4,83.06 113.7,83.06 113.7,82.86 113.7,83.16 113.4,83.16
  Top 0.305: 113.1,82.76 112.7,82.76 | 113.1,82.76 113.2,82.76 | 112.7,82.76 111.7,82.76 111,82.76 111,82.86 111.1,82.86 111.1,83.26 | 113.1,82.76 112.7,82.76 | 113.1,82.76 113.7,82.76 | 113.4,83.06 113.4,82.86
S$493
  Top 0.254: 111.2,65.86 111,65.86 | 111.2,65.86 111.1,66.06 | 111.2,65.86 111.5,65.46 111.2,65.76 | 111.2,65.86 111.3,65.86 111.2,65.76 | 111.2,65.76 111.2,65.86 | 111.2,65.76 111,65.96
S$494
  Top 0.254: 111.1,67.86 111.7,67.86 111.7,68.06 111.3,68.06 111.3,68.46 111.5,68.46 111.5,68.16
S$495
  Top 1.27: 119.1,71.56 119.7,71.56 119.7,71.96 113.9,66.06
S$496
  Top 0.254: 117.3,69.06 117.3,68.26
S$497
  Top 0.61: 140.8,40.96 144.5,40.96 147.2,43.66 147.2,49.96 147.3,49.96
S$498
  Top 0.61: 152.4,58.26 152.4,63.26 | 152.4,63.26 152.4,63.46 | 152.4,63.26 152.4,68.76
S$499
  Top 0.61: 152.1,61.96 152.1,57.96
S$500
  Top 0.61: 140.7,39.56 145.4,39.56
S$501
  Top 0.61: 145.5,39.56 149.7,43.86
S$502
  Top 0.61: 149.8,49.76 149.8,44.06
S$503
  Top 0.61: 144.7,43.26 144.7,49.96
S$504
  Top 0.61: 144.6,43.16 143.6,42.16 141,42.16
S$505
  Top 0.61: 140.9,38.26 146.1,38.26 152.1,44.26
S$506
  Top 0.61: 152.3,49.76 152.3,44.36
S$507
  Top 0.61: 148.7,18.36 148.7,24.46
S$508
  Top 0.61: 148.7,15.56 153.9,15.56 153.9,15.66
S$509
  Top 0.61: 142,36.96 154.6,36.96 154.9,36.96 | 155.4,36.96 154.9,36.96 | 154.9,36.96 154.9,35.36
  Top 1.27: 154.6,36.96 154.8,36.96 154.8,42.26 154.1,42.26 154.1,36.86 153.6,36.86 153.6,40.56 152.8,40.56 152.8,37.16 151.9,37.16 151.9,39.36 151.4,39.36 151.4,37.16 150.4,37.16 150.4,37.86
S$510
  Top 0.61: 141.5,35.76 155.1,35.76
S$511
  Top 0.61: 141.7,29.46 149.6,29.46 149.6,29.36
S$512
  Top 0.61: 141.8,30.66 147.6,30.66 150.1,30.66
  Top 1.27: 142.4,25.66 148.7,32.46 148.7,25.16 147.6,25.16 147.6,30.66
S$513
  Top 0.61: 141.6,31.96 149.8,31.96 149.8,31.76
S$514
  Top 0.61: 141.9,33.06 149.4,33.06 149.4,32.96
S$515
  Top 0.61: 141.9,34.36 149.4,34.36 149.4,34.26
S$516
  Top 0.61: 147.7,15.66 147.7,13.96 146,12.66
S$517
  Top 0.61: 146.7,15.46 146.7,13.46
S$518
  Top 0.61: 137.4,14.86 137.4,15.96 137.5,15.96 137.5,25.56 | 137.4,26.86 137.4,25.56 137.5,25.56 | 137.5,25.56 138.7,25.56 138.7,26.86
S$519
  Top 0.61: 137.5,16.26 142.1,20.86
S$520
  Top 0.61: 146.7,18.36 146.7,19.06
S$521
  Top 0.61: 146.7,19.16 144.9,20.86 142.1,20.86
S$522
  Top 0.61: 134.8,14.86 134.9,14.86 134.9,28.16
S$523
  Top 0.61: 140.9,64.86 143.8,64.86 | 143.8,64.86 145.4,64.86 149.8,60.36 | 140.8,63.86 143.8,63.86 143.8,64.86
S$524
  Top 0.61: 149.8,60.46 149.8,58.66
S$525
  Top 0.61: 140.8,62.86 144.6,62.86 147.2,60.06
S$526
  Top 0.61: 147.1,60.16 147.2,60.16 147.2,58.36
S$527
  Top 0.61: 132.3,14.86 132.3,16.26 134.9,18.86 134.9,17.56
S$528
  Top 0.61: 132.3,26.76 132.3,25.46 131,25.46 131,25.56 | 131,25.56 131,26.96 | 131,25.56 131,22.86 129.8,21.46
S$529
  Top 0.61: 128.4,25.46 127.3,25.46
S$530
  Top 0.61: 138.2,64.86 135.8,64.86 133.6,66.46
S$531
  Top 0.61: 133.5,66.56 133.5,69.76
S$532
  Top 0.61: 128.5,26.86 128.5,25.46
S$533
  Top 0.61: 136.2,26.76 136.1,26.76 136.1,25.36
S$534
  Top 0.61: 136.1,25.56 136.1,25.46 139.9,25.36 139.9,27.66
S$535
  Top 0.61: 124.9,42.16 123.1,42.16 | 123.1,42.16 122.7,42.16 | 122.7,42.16 121,42.16 121,42.06 | 124.6,40.96 123.1,40.96 123.1,40.76 | 123.1,40.76 123.1,39.56 124.9,39.56 124.9,39.66 | 123.1,42.16 123.1,40.76 | 122.7,42.16 122.7,39.56 122.3,39.56 | 121.8,39.56 122.3,39.56 | 122.3,39.56 122.3,41.96
S$536
  Top 0.61: 125.1,38.26 121,38.26 121,38.36
S$537
  Top 0.61: 125.1,36.96 121.3,36.96 121.3,37.06
S$538
  Top 0.61: 124.5,35.76 123.2,35.76 123.2,34.46 | 123.2,34.46 124.7,34.46 | 117.7,34.46 123.2,34.46
S$539
  Top 0.61: 115.9,33.96 116.8,33.96 117.7,34.46
S$540
  Top 0.61: 122.1,18.16 122.1,16.26
S$541
  Top 0.61: 122.1,16.26 123.9,14.66
S$542
  Top 0.61: 127.3,14.66 123.9,14.66
S$543
  Top 0.61: 120.3,18.56 120.4,18.56 120.4,16.36 118.7,14.66 111.9,14.66 111.9,14.76
S$544
  Top 0.61: 123.5,50.56 123.5,47.86 120.2,44.06
S$545
  Top 0.61: 114.1,21.16 112,21.16
S$546
  Top 0.61: 121.9,29.36 124.8,29.36
S$547
  Top 0.61: 120.1,21.26 115.7,21.26
S$548
  Top 0.61: 122.2,21.26 122.2,22.66 120.5,23.76 115.8,23.76
S$549
  Top 0.61: 121.2,21.16 121.2,22.96
S$550
  Top 0.61: 124.8,30.76 120.7,30.76 118.8,28.76
S$551
  Top 0.61: 115.7,28.76 118.9,28.76
S$552
  Top 0.61: 116.2,26.16 118.6,26.16 121.9,29.36
S$553
  Top 0.61: 123.2,31.86 119.4,31.86 118.4,31.06 115.8,31.06 115.8,31.16 | 123.2,31.86 124.7,31.86 | 124.6,33.26 123.2,33.26 123.2,31.86
S$554
  Top 0.61: 131.2,59.56 131.2,61.46 132.9,62.76 138,62.76 138,62.96
S$555
  Top 0.61: 126.2,59.76 126.2,61.26 | 128.7,60.66 128.7,61.26 126.2,61.26 | 128.7,60.66 128.7,59.86 | 126.2,61.26 123.6,61.26 123.6,60.76 | 123.6,60.76 123.6,59.56 | 126.2,61.26 126.2,63.76 | 123.5,62.66 123.6,62.66 123.6,60.76 | 128.7,62.66 128.7,60.66
S$556
  Top 0.61: 144.6,58.66 144.6,60.26 143.5,61.26 141.6,61.26 140,59.66
S$557
  Top 0.61: 129.8,44.06 129.8,45.56 128.5,46.86 126.1,49.16
S$558
  Top 0.61: 123.5,49.26 127.2,45.86 127.2,44.86
S$559
  Top 0.61: 126.1,50.66 126.1,49.16
S$560
  Top 0.61: 137.4,25.46 136.2,25.46
S$561
  Top 0.61: 139.7,25.46 137.5,25.46 137.5,25.36 | 137.5,25.36 136.3,25.36 | 137.5,25.36 139.6,25.36
S$562
  Top 0.61: 128.7,50.66 128.7,49.46 132.3,46.16
S$563
  Top 0.61: 134.9,44.66 134.9,46.06 133.4,46.06 133.4,46.16 | 133.6,44.66 133.6,46.16 133.4,46.16 | 133.4,46.16 132.3,46.16 | 132.3,46.16 131.1,46.16 131.1,44.16 | 132.3,44.36 132.3,46.16
S$564
  Top 0.61: 138.7,44.76 138.7,46.06 140,46.06 | 140,44.76 140,46.06 | 140,46.06 140,59.66 | 140,46.06 140,43.86
S$565
  Top 0.61: 137.4,44.36 137.4,46.06 136.1,46.06 136.1,44.36
S$566
  Top 0.61: 136.8,46.16 132.5,50.36
S$567
  Top 1.27: 147.5,35.86 155.6,44.06
S$568
  Top 1.27: 144.6,23.06 142.4,23.06 142.4,25.66 144.5,25.66 144.5,25.46 144.2,25.46 144.2,23.66 143.5,23.66 143.5,24.66
S$569
  Top 1.27: 119.2,59.26 119,59.76 117.7,56.56 124,67.06
S$570
  Top 1.27: 155.4,59.86 145.7,69.56 145.7,69.46 145.9,69.46
S$571
  Top 1.27: 151.3,69.36 151.7,69.36 151.7,64.86 150.9,64.86 150.9,65.96 150.8,65.96 150.8,68.66 148.6,68.66 148.6,68.26 150,68.26 150,67.26 150.1,67.26 150.1,66.66 149.4,66.66 149.4,67.36
S$572
  Top 1.27: 148.5,69.36 148.4,69.36 148.4,67.26 148.1,67.26 148.1,68.76
S$573
  Top 1.27: 121.8,62.76 121.6,62.76
S$574
  Top 1.27: 146.3,26.56 143.7,26.56 143.7,26.36
S$575
  Top 1.27: 120.5,13.86 115.7,13.86 115.7,13.96 120.9,13.76 116.9,18.16
S$576
  Top 1.27: 117.8,15.56 118.8,15.56 118.8,13.96
S$577
  Top 0.61: 116.1,62.36 120.2,62.36 120.2,61.66
S$578
  Top 0.61: 132.6,50.26 131.1,50.26
S$579
  Top 0.61: 131.1,50.46 132.4,50.46
S$580
  Top 0.61: 129.8,45.66 128.5,45.66 | 128.5,45.66 128.5,44.66 | 128.5,45.66 128.5,46.36 128.8,46.36 128.8,46.06
S$581
  Top 0.61: 118.5,31.46 115.9,31.46
S$582
  Top 0.61: 119,29.16 115.7,29.16
S$583
  Top 0.61: 115.9,26.46 118.8,26.46
S$584
  Top 0.61: 115.7,23.46 120.9,23.46 120.9,23.36
S$585
  Top 0.61: 115.7,21.06 119.7,21.06
S$586
  Top 0.61: 112,20.86 114.1,20.86 114.1,21.36 112.3,21.36
S$587
  Top 0.61: 126.9,14.96 127.1,14.96 127.1,16.06
S$588
  Top 0.61: 128.5,61.66 124,61.66
S$589
  Top 0.61: 128.4,62.16 123.9,62.16
S$590
  Top 0.61: 123.9,62.26 120.3,62.26 120.3,62.16
S$591
  Top 0.61: 128.6,62.26 131.9,62.26 131.9,62.16
S$592
  Top 1.016: 146.6,23.46 149.6,20.06 151.9,19.56
S$593
  Top 1.016: 152.8,22.26 148.4,22.26 148.4,22.36
S$594
  Top 1.016: 126.1,84.86 126.1,86.86 127.4,86.86 124.8,83.36 118,76.56 118,77.66 124.8,77.66
S$595
  Top 1.016: 125.4,83.96 125.5,83.96 125.5,82.46 126.2,82.46 126.2,84.06
S$596
  Top 0.61: 131.2,83.86 131.2,84.56 132.4,84.56 132.4,83.66
S$597
  Top 0.61: 141.1,83.66 139.9,83.66 138.3,85.16
S$598
  Top 0.61: 138.3,85.26 133.7,85.26 133.7,83.66
S$599
  Top 0.61: 135,85.16 135,83.16
S$600
  Top 0.61: 141.2,82.26 139.3,82.26 | 139.3,82.26 139.1,82.26 137.5,83.76 137.5,82.66 139.3,82.26
S$601
  Top 0.61: 137.9,83.16 138,83.16 138,82.76
S$602
  Top 0.61: 137.5,83.86 137.5,84.06 136.2,84.06 136.2,83.76
S$603
  Top 0.61: 150.5,81.46 150.4,81.46 150.4,83.66 148.5,83.66 148.5,83.56
S$604
  Top 0.61: 152.2,81.46 153.8,81.46
S$605
  Top 0.61: 150.5,78.36 148.3,78.36 148.3,78.46 150.2,78.46
S$606
  Top 0.61: 148.3,77.26 151.4,77.26 151.4,78.66
S$607
  Top 0.61: 148.3,75.86 151.7,75.86 152.4,76.56 152.4,78.46
S$608
  Top 0.61: 141.1,81.06 140.1,81.06 138.8,79.76 138.8,76.76
S$609
  Top 0.61: 138.8,76.56 137.6,76.06 137.6,76.56
S$610
  Top 0.61: 140.7,79.76 140.7,77.16
S$611
  Top 0.61: 140.4,79.76 140.4,77.16
S$612
  Top 0.61: 140.9,75.96 140.2,75.96 137.6,73.96 136.2,73.96 | 136.2,73.96 132.5,73.96 132.5,76.36 | 136.3,76.06 136.2,76.06 136.2,73.96
S$613
  Top 0.61: 133.7,76.16 133.7,74.26
S$614
  Top 0.61: 135,76.06 135,74.06
S$615
  Top 1.016: 150.4,71.76 152.9,74.36 154.9,76.46
S$616
  Top 1.016: 153.6,72.26 153.6,74.16 153.1,74.16 153.1,72.26 152.5,72.26 152.5,72.86
S$617
  Top 1.016: 154.2,78.06 154.2,82.46 148.3,88.46
S$618
  Top 1.016: 151.8,86.56 151.8,85.46
S$619
  Top 1.016: 131.7,85.36 131.6,85.36 133.1,86.46 135.1,86.86
S$620
  Top 1.016: 129.9,74.36 130,74.36 130,71.26 128.8,71.26 128.8,73.86 135.2,71.26
S$621
  Top 0.61: 129.7,14.76 129.8,14.76 129.8,21.36
S$622
  Top 0.61: 133.6,25.46 133.6,27.06 | 133.6,25.46 132.3,25.56 | 132.4,25.46 133.6,25.46
S$623
  Top 0.61: 127.3,26.86 127.3,25.96 127.2,25.96 127.2,14.66
S$624
  Top 0.61: 129.8,25.16 129.8,26.76 | 129.8,25.16 129.8,24.66 | 129.8,24.06 129.8,25.16
S$625
  Top 0.61: 129.8,23.96 127.2,21.36 127.2,23.96
S$626
  Top 0.61: 145.9,12.66 144,12.66 141.7,14.96
S$627
  Top 0.61: 141.7,15.06 139.9,15.06 139.9,14.56 141.5,14.56 141.5,14.66 141.8,14.66 141.8,14.46 142,14.46
S$628
  Top 0.254: 111.2,79.76 111.2,78.76 112,78.76 112,78.86 111.9,78.86 111.9,79.06 111.4,79.06 111.4,79.56 111.6,79.56 111.6,79.26 111.7,79.26 111.7,78.86 111.4,78.86
S$629
  Top 0.61: 126.7,86.46 126.9,86.46 126.9,83.26 124.6,83.26 124.6,80.76 124.2,80.76 124.2,81.86 123.9,81.86 123.9,80.66 123.5,80.66 123.5,81.16 123.2,81.16 123.2,79.76 122.8,79.76 122.8,80.56 122.4,80.56 122.4,78.76 122.1,78.76 | 121.2,78.76 122.1,78.76 | 122.1,78.76 122.1,79.56 121.6,79.56 121.6,79.06
S$630
  Top 0.254: 111.1,83.06 111.1,83.26 112.2,84.16
  Top 0.305: 111.1,83.26 111.1,82.86
S$631
  Top 0.254: 111.2,84.06 111.2,83.86 | 111.2,83.36 111.2,83.86 | 111.2,83.86 111.5,83.86 | 111.5,83.86 111.8,83.86 111.8,83.96 111.4,83.76 111.4,83.66 111.5,83.86 | 111.5,83.86 111.5,83.76
S$632
  Top 0.254: 111.3,84.26 111.4,84.26 111.4,83.96 111.9,83.96 111.9,84.06 112,84.06 112,84.16 111.5,84.16 111.5,84.06
S$633
  Top 0.254: 112.2,78.56 112.2,78.86
S$634
  Top 0.254: 121.2,79.26 121.3,79.26 121.3,78.86
S$635
  Top 0.254: 122.1,80.06 122.1,79.76
S$636
  Top 0.254: 111.4,81.76 112.7,81.76 | 111,81.76 111,78.16 | 112.5,78.66 111.1,80.06 111,80.16 111,81.06
  Top 0.305: 113,81.76 113.2,81.76 | 111.4,81.76 113,81.76 | 111.4,81.76 111,81.76 111.1,81.76 111.1,81.36 | 111.1,80.06 111.1,81.36 | 113,81.76 113.4,81.76 113.7,81.76 | 111.1,81.36 111.4,81.76
S$637
  Top 0.305: 111.5,82.76 111.1,82.96
S$638
  Top 0.406: 122.9,12.16 120.7,14.56
S$639
  Top 0.406: 111.3,81.56 111.3,81.36 | 111.3,81.36 111.3,79.66 | 111.3,81.36 111.6,81.66
S$640
  Top 0.254: 114.3,82.76 114.7,82.76 114.7,83.16 114.3,83.16 114.3,82.86 114.6,82.86 114.6,82.96 114.5,82.96
  Top 0.305: 114.3,82.76 114.5,82.76
S$641
  Top 0.254: 113.4,81.46 113.1,81.76
S$642
  Top 0.305: 114.3,81.66 114.5,81.66
S$643
  Top 0.254: 113.4,81.66 113.4,81.26 113.7,81.26 113.7,81.66 113.6,81.66 113.6,81.36
S$644
  Top 0.254: 114.3,81.76 114.3,81.26 114.7,81.26 114.7,81.76 114.4,81.76 114.4,81.36 114.6,81.36 114.6,81.56
(copper drawn outside any net)
  shapes: Top area x219

## Text on the board
tPlace: KEEP OUT AREA | KEEP OUT AREA | KEEP OUT AREA | Medium | Medium | Medium | UCODE G2iM+ | V0 | UCODE G2iM+ | V0 | UCODE G2iM+ | V0
bPlace: KEEP OUT AREA | KEEP OUT AREA | KEEP OUT AREA